# Altium PCB esp.PcbDoc
Units mm, origin at the board's own origin, x right, y up, seen from the top; angles counter-clockwise.
Board outline 25.4 x 51.8 mm, 2 copper layers (Top Layer, Bottom Layer); 34 components, 42 nets, 236 pads, 65 vias.
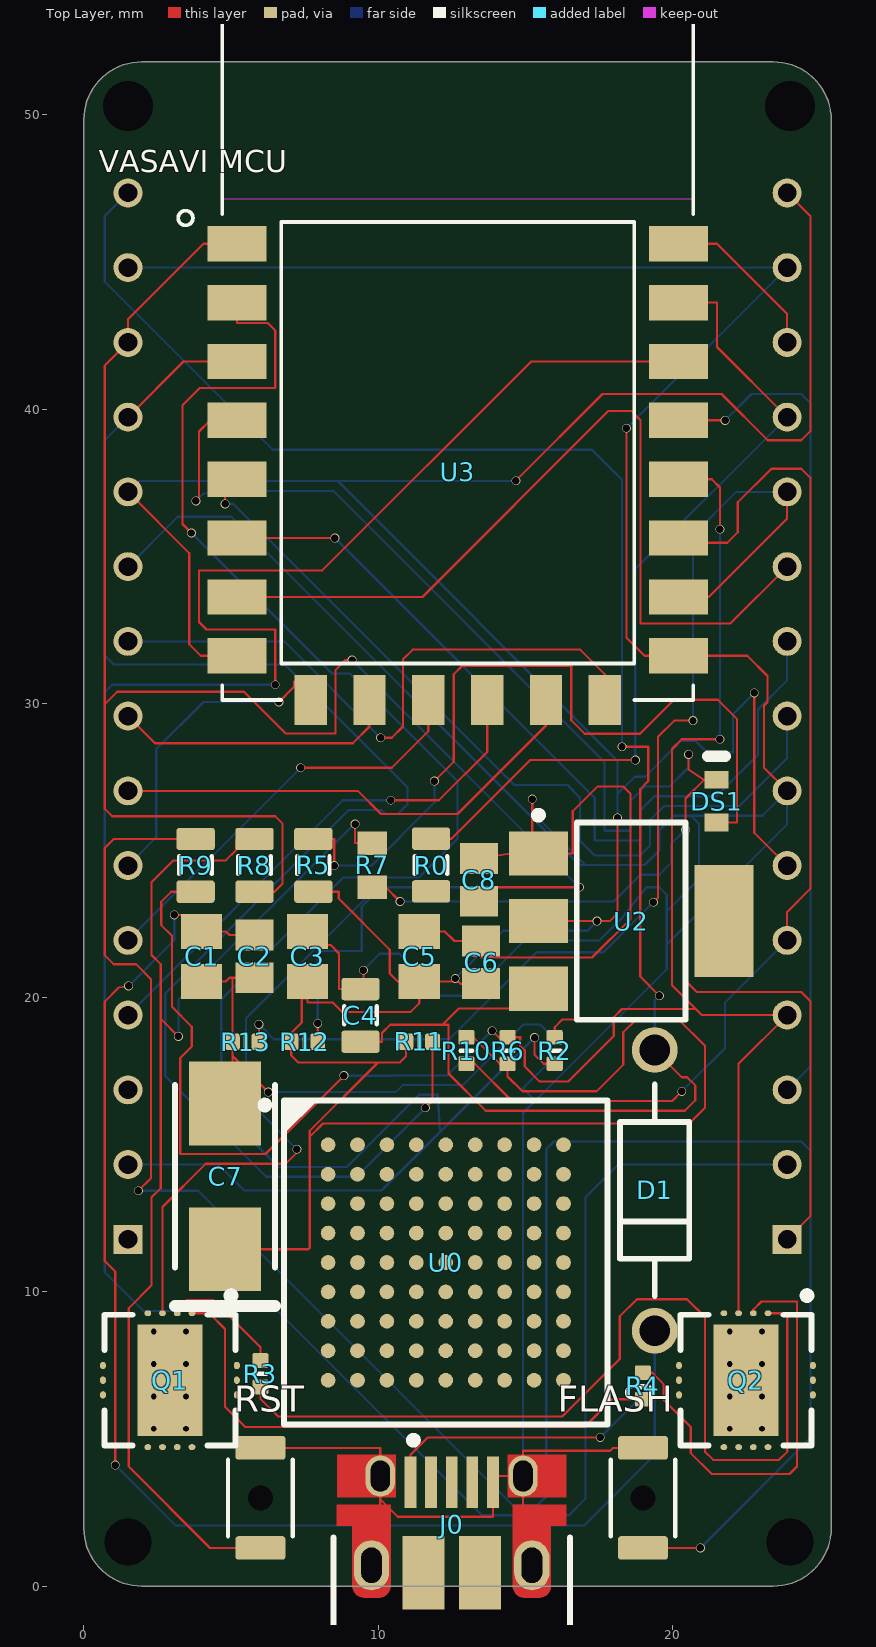
[diagram p0: Top Layer view]
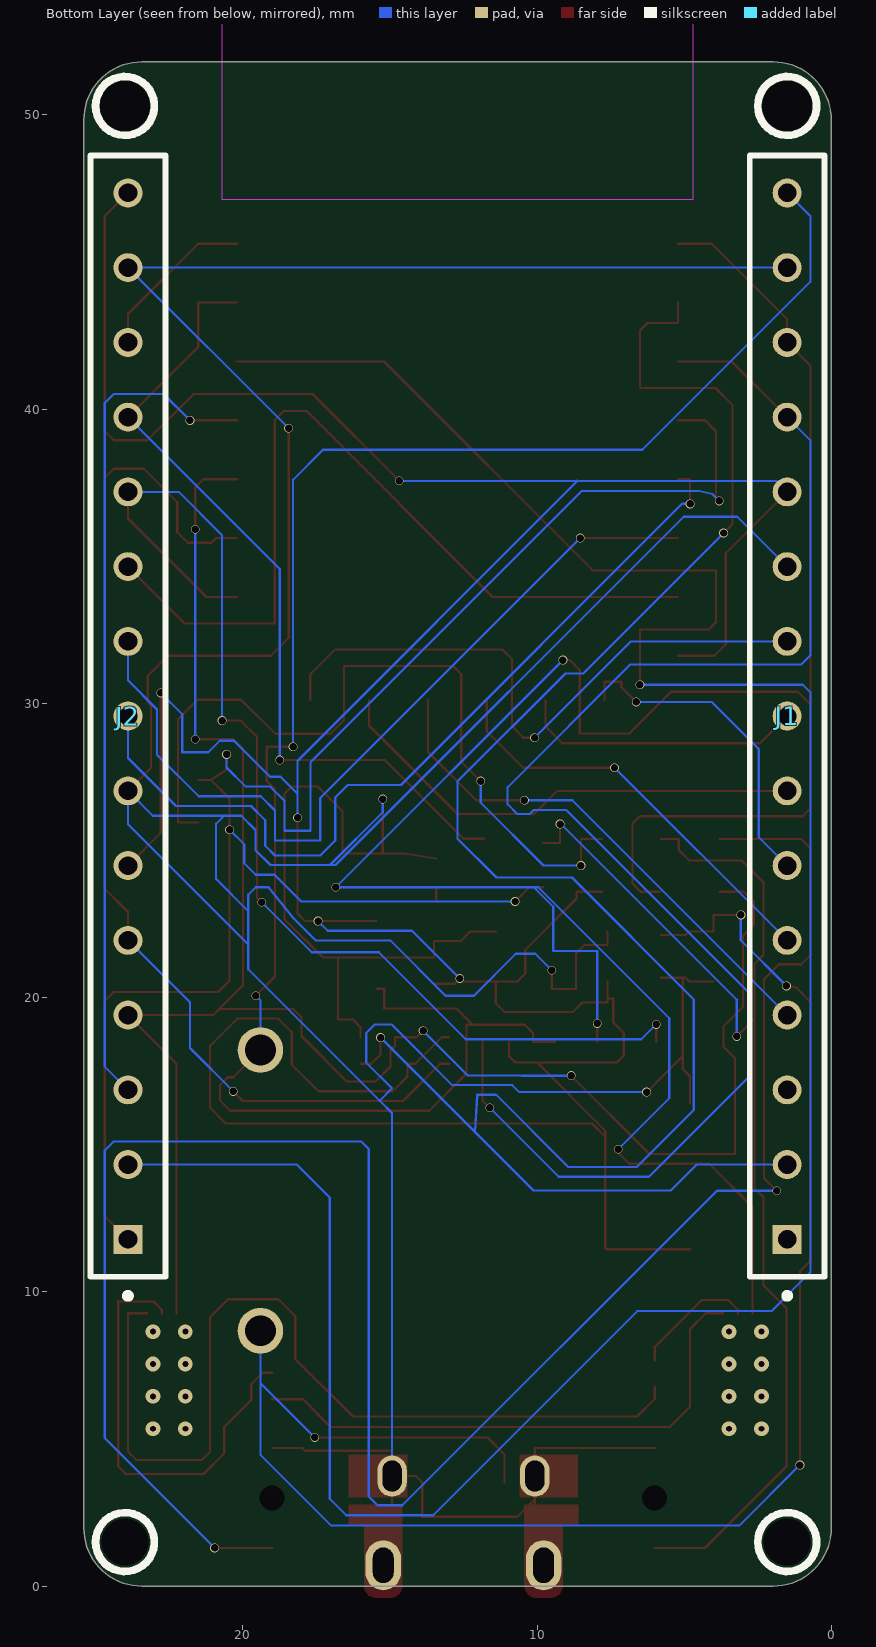
[diagram p1: Bottom Layer view, seen from below]
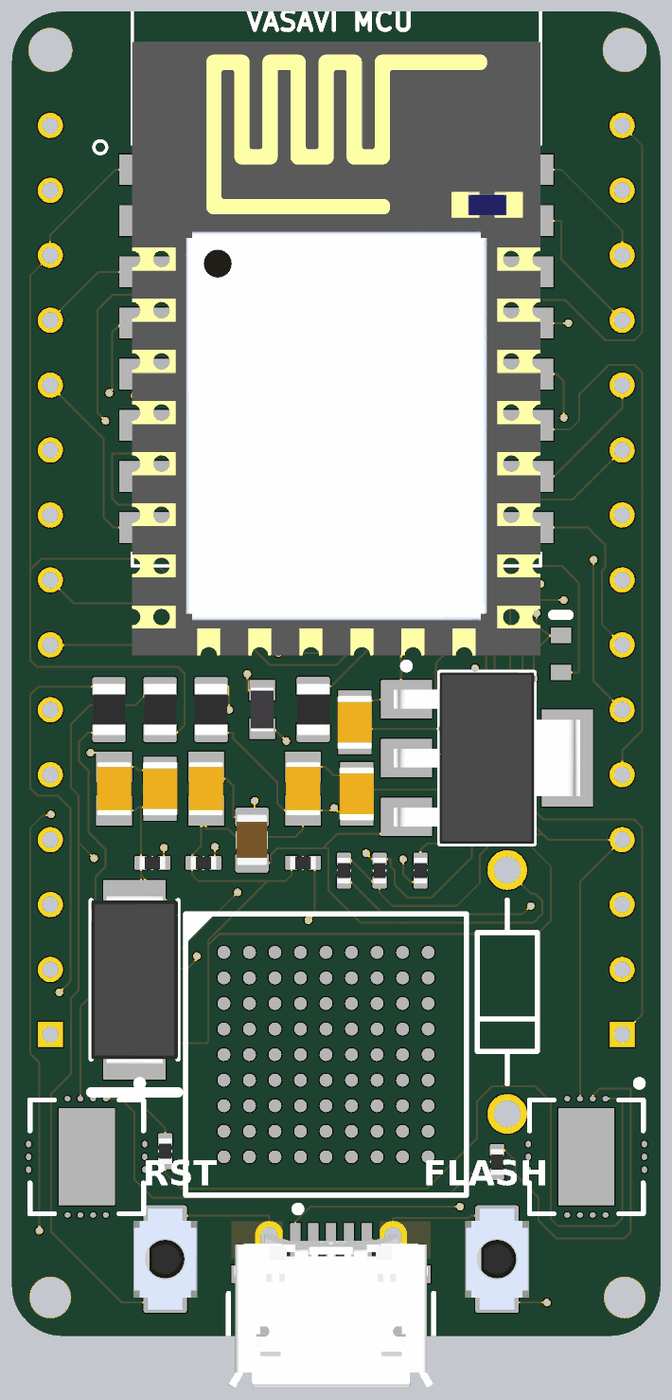
[diagram p2: 3D render of the assembled board from above, using the file's embedded part models]

## Layer stack, top to bottom
Top Solder: solder mask 0.0102, Solder Resist, Dk 3.5
Top Layer: signal copper 0.0356
Dielectric 1: dielectric 0.32, FR-4, Dk 4.8
Bottom Layer: signal copper 0.0356
Bottom Solder: solder mask 0.0102, Solder Resist, Dk 3.5

## Board outline
0,1.975 0,49.825 cw(c1.975,49.825) 1.975,51.8 23.425,51.8 cw(c23.425,49.825) 25.4,49.825 25.4,1.975 cw(c23.425,1.975) 23.425,0 1.975,0 cw(c1.975,1.975)

## Design rules (kind name [scope] priority, off if disabled: settings)
AssemblyTestPointUsage [All] p1: isadvanced=TRUE
AssemblyTestpoint [All] p1: isadvanced=TRUE testpointundercomponent=TRUE minsize=1.016 maxsize=2.54 preferedsize=1.524 minholesize=0 maxholesize=1.016 preferedholesize=0.813 testpointgrid=0.025 usegrid=TRUE gridtolerance=0 allowsidetop=TRUE allowsidebottom=TRUE
Clearance Clearance_1 [OnMid vs OnMid] p1: gap=0.254 ignorepadtopadclearanceinfootprint=FALSE sourcerule=44 cellrowname=All cellrowtype=0 cellcolname=All cellcoltype=0 innerlayers=TRUE
Clearance Clearance_2 [(ExistsOnLayer('Top Layer') Or ExistsOnLayer('Bottom Layer')) vs (ExistsOnLayer('Top Layer') Or ExistsOnLayer('Bottom Layer'))] p2: gap=0.254 ignorepadtopadclearanceinfootprint=FALSE sourcerule=44 cellrowname=All cellrowtype=0 cellcolname=All cellcoltype=0 outerlayers=TRUE
Clearance [All] p3: gap=0.254 ignorepadtopadclearanceinfootprint=FALSE ismatrix=TRUE
ComponentClearance [All] p1: isadvanced=TRUE gap=0.254 collisioncheckmode=3 verticalgap=0.254 showdistances=FALSE
DiffPairsRouting [All] p1: maxlimit=0.254 minlimit=0.254 mostfreqgap=0.254 toplayer_minwidth=0.381 toplayer_maxwidth=0.381 toplayer_prefwidth=0.381 bottomlayer_minwidth=0.381 bottomlayer_maxwidth=0.381 bottomlayer_prefwidth=0.381 maxuncoupledlength=12.7
FabricationTestPointUsage [All] p1: isadvanced=TRUE valid=0 allowmultiple=FALSE
FabricationTestpoint [All] p1: isadvanced=TRUE side=3 testpointundercomponent=TRUE minsize=1.016 maxsize=2.54 preferedsize=1.524 minholesize=0 maxholesize=1.016 preferedholesize=0.813 testpointgrid=0.025 allowsidetop=TRUE allowsidebottom=TRUE usegrid=TRUE gridtolerance=0
FanoutControl Fanout_BGA [IsBGA] p1: isadvanced=TRUE bgadir=Out bgaviamode=Centered fanoutstyle=Auto fanoutdirection=Alternating viagrid=0.025 // Fanout_BGA (Default Rule)
FanoutControl Fanout_LCC [IsLCC] p2: isadvanced=TRUE bgadir=Out bgaviamode=Centered fanoutstyle=Auto fanoutdirection=Alternating viagrid=0.025 // Fanout_LCC (Default Rule)
FanoutControl Fanout_SOIC [IsSOIC] p3: isadvanced=TRUE bgadir=Out bgaviamode=Centered fanoutstyle=Auto fanoutdirection=Alternating viagrid=0.025 // Fanout_SOIC (Default Rule)
FanoutControl Fanout_Small [(CompPinCount < 5)] p4: isadvanced=TRUE bgadir=Out bgaviamode=Centered fanoutstyle=Auto fanoutdirection=OutThenIn viagrid=0.025 // Fanout_Small (Default Rule)
FanoutControl Fanout_Default [All] p5: isadvanced=TRUE bgadir=Out bgaviamode=Centered fanoutstyle=Auto fanoutdirection=Alternating viagrid=0.025 // Fanout_Default (Default Rule)
Height [All] p1: isadvanced=TRUE minheight=0 maxheight=25.4 prefheight=12.7
HoleSize [All] p1: isadvanced=TRUE absolutevalues=TRUE maxlimit=2.54 minlimit=0.025 maxpercent=80.000 minpercent=20.000
HoleToHoleClearance [All] p1: isadvanced=TRUE gap=0.254 allowstackedmicrovias=TRUE
LayerPairs [All] p1: isadvanced=TRUE enforce=TRUE
MinimumSolderMaskSliver [All] p1: isadvanced=TRUE minsoldermaskwidth=0.1
NetAntennae [All] p1: isadvanced=TRUE netantennaetolerance=0
PasteMaskExpansion [All] p1: isadvanced=TRUE expansion=0
PlaneClearance [All] p1: isadvanced=TRUE clearance=0.508
PlaneConnect [All] p1: isadvanced=TRUE planeconnectstyle=Relief reliefexpansion=0.508 reliefentries=4 reliefconductorwidth=0.254 reliefairgap=0.254
PolygonConnect "Schematic Polygon Connect Style" [InNet('DSR')] p1: connectstyle=Relief reliefconductorwidth=0.254 reliefentries=4 polygonreliefangle="90 Angle" airgapwidth=0.254
PolygonConnect [All] p2: connectstyle=Relief reliefconductorwidth=0.254 reliefentries=4 polygonreliefangle="90 Angle" airgapwidth=0.254
RoutingCorners RoutingCornerStyle_1 [All] p1: isadvanced=TRUE cornerstyle=Round minsetback=2.54 maxsetback=2.54
RoutingCorners [All] p2: isadvanced=TRUE cornerstyle=45-Degree minsetback=2.4 maxsetback=2.44
RoutingPriority [All] p1: isadvanced=TRUE routingpriority=0
RoutingVias RoutingViaStyle_1 [All] p1: isadvanced=TRUE holewidth=0.254 width=0.3 viastyle="Through Hole" minholewidth=0.25 minwidth=0.25 maxholewidth=0.254 maxwidth=0.6
RoutingVias [All] p2: holewidth=0.711 width=1.27 viastyle="Through Hole" minholewidth=0.711 minwidth=1.27 maxholewidth=0.711 maxwidth=1.27
ShortCircuit [All] p1: isadvanced=TRUE allowed=FALSE
SilkToSilkClearance [All] p1: isadvanced=TRUE silktosilkclearance=0.254
SilkToSolderMaskClearance [IsPad] p1: isadvanced=TRUE minsilkscreentomaskgap=0.254 clearancetoexposedcopper=TRUE
SolderMaskExpansion [All] p1: isadvanced=TRUE expansion=0.052 istentingtop=FALSE
SupplyNets "Schematic Supply Nets_3" [InNet('GND')] p1: isadvanced=TRUE voltage=0.000
SupplyNets "Schematic Supply Nets_2" [InNet('VCCUSB')] p2: isadvanced=TRUE voltage=0.000
SupplyNets "Schematic Supply Nets_1" [InNet('VCC3V3')] p3: isadvanced=TRUE voltage=0.000
SupplyNets "Schematic Supply Nets" [InNet('VCC5V')] p4: isadvanced=TRUE voltage=0.000
UnRoutedNet [All] p1: isadvanced=TRUE
UnpouredPolygon [All] p1: isadvanced=TRUE
Width SMD_Neckdown [All] p1: isadvanced=TRUE maxlimit=0.254 minlimit=0.05 preferedwidth=0.075 minimp=50.000000 maximp=50.000000 favimp=50.000000
Width [All] p2: maxlimit=0.254 minlimit=0.254 preferedwidth=0.254
3 further rules are at their usual default settings.

## Classes and differential pairs
differential pair D: +D_P -D_N

## Components (designator, comment, footprint, x,y, rotation, side; value= is the part's Value field where it differs from the comment)
C1 "Capacitor 10 uF +/- 10% 16 V 0805" CAPC2013X135X45NL10T25 4,21.4 r90 top value=10µF
C2 "Capacitor 100 nF +/-10% 50 V 0805" CAPC2013X95X50LL10T25 5.8,21.4 r90 top value=100nF
C3 "Capacitor 10 uF +/- 10% 16 V 0805" CAPC2013X135X45NL10T25 7.6,21.4 r90 top value=10µF
C4 "Capacitor 10µF +/-20% 25V 0805" CAPC0805(2012)145_L 9.4,19.4 r90 top value=10µF
C5 "Capacitor 10 uF +/- 10% 16 V 0805" CAPC2013X135X45NL10T25 11.4,21.4 r90 top value=10µF
C6 "Capacitor 100 nF +/-10% 50 V 0805" CAPC2013X95X50LL10T25 13.5,21.2 r90 top value=100nF
C7 "TAJC107K016RNJ" AVX-TAJ-C-2_M 4.8,13.925 r90 top value=100µF
C8 "Capacitor 100 nF +/-10% 50 V 0805" CAPC2013X95X50LL10T25 13.425,24 r90 top value=100nF
D1 "1N5819" ONSC-AXIAL_LEAD-2-59-10_P 19.4,13.45 r90 top
DS1 "TLMB1100-GS08" VISH-TLMX1100-2_V 21.5,26.675 r90 top
FLASH "KEY_FLASH" OMRON-B3U-1000P-2-B_V 19,3 r90 top (schematic designator SW2)
J0 "10103594-0001LF" FCI-10103594-0001LF_V 12.5,2.1 r0 top
J1 "TS-115-G-AA" SAMTEC_TS-115-G-AA 1.5,29.566 r90 bottom
J2 "TS-115-G-AA" SAMTEC_TS-115-G-AA 23.9,29.566 r90 bottom
Q1 "SS8050DBU" QFN50P400X400X80_HS-15N 2.925,7 r270 top
Q2 "SS8050DBU" QFN50P400X400X80_HS-15N 22.5,7 r270 top
R0 "Resistor 470R +/-5% 0805 125 mW" RESC0805(2012)_L 11.8,24.5 r270 top value=470
R1 "MCRE000196" MCRE000196-Footprint-1 329.692,40.513 r90 top value=220k
R2 "Resistor 100K +/-1 % 0402 63 mW" RESC0402(1005)_L 16,18.2 r90 top value=100k
R3 "Resistor 12K  +/-1 % 0402 63 mW" RESC0402(1005)_L 6,7.22 r90 top value=12k
R4 "Resistor 12K  +/-1 % 0402 63 mW" RESC0402(1005)_L 19,6.8 r90 top value=12k
R5 "Resistor 470R +/-5% 0805 125 mW" RESC0805(2012)_L 7.8,24.5 r90 top value=470
R6 "Resistor 12K  +/-1 % 0402 63 mW" RESC0402(1005)_L 14.4,18.2 r90 top value=12k
R7 "Resistor 0R +/- 5% 0603 100 mW" RESC1608X55X25ML10T15 9.8,24.5 r90 top value=0
R8 "Resistor 470R +/-5% 0805 125 mW" RESC0805(2012)_L 5.8,24.5 r90 top value=470
R9 "Resistor 470R +/-5% 0805 125 mW" RESC0805(2012)_L 3.8,24.5 r90 top value=470
R10 "Resistor 12K  +/-1 % 0402 63 mW" RESC0402(1005)_L 13,18.2 r270 top value=12k
R11 "Resistor 12K  +/-1 % 0402 63 mW" RESC0402(1005)_L 11.4,18.5 r0 top value=12k
R12 "Resistor 12K  +/-1 % 0402 63 mW" RESC0402(1005)_L 7.5,18.5 r0 top value=12k
R13 "Resistor 12K  +/-1 % 0402 63 mW" RESC0402(1005)_L 5.5,18.5 r0 top value=12k
RST "KEY_RST/USER" OMRON-B3U-1000P-2-B_V 6,3 r90 top (schematic designator SW1)
U0 "CP2102-GM" BGA81C100P9X9_1100X1100X350 12.3,11 r0 top
U2 "NCP1117ST33T3G" ONSC-SOT-223-4-318H-01_A_V 18.6,22.6 r0 top
U3 "ESP8266-12E/ESP-12E" XCVR_ESP8266-12E/ESP-12E 12.706,38.617 r0 top

## Footprints (in the part's own frame and the unit in brackets; to place one, negate y for a bottom-side part, rotate by r counter-clockwise, add the part's x,y. Pads: shape width x height; smd on the part's side, far side on the other; paste and mask are expansions set on the pad)
AVX-TAJ-C-2_M [mm] "Molded Capacitor, 2-Leads, Body 6.2x3.4mm, IPC Low Density"
  rect 2.85x2.45 smd: 1(-2.475,0) 2(2.475,0)
  silkscreen extent -4.4,-1.7 3.1,1.7, body extent -3.32,-1.7 3.32,1.7, height 2.8
BGA81C100P9X9_1100X1100X350 [mm] "BGA, 81-Leads, Body 11.00x11.00mmx3.50mm, Pitch 1.00mm"
  round 0.5 smd: A1(-4,4) A2(-3,4) A3(-2,4) A4(-1,4) A5(0,4) A6(1,4) A7(2,4) A8(3,4) A9(4,4) B1(-4,3) B2(-3,3) B3(-2,3) B4(-1,3) B5(0,3) B6(1,3) B7(2,3) B8(3,3) B9(4,3) C1(-4,2) C2(-3,2) C3(-2,2) C4(-1,2) C5(0,2) C6(1,2) C7(2,2) C8(3,2) C9(4,2) D1(-4,1) D2(-3,1) D3(-2,1) D4(-1,1) D5(0,1) D6(1,1) D7(2,1) D8(3,1) D9(4,1) E1(-4,0) E2(-3,0) E3(-2,0) E4(-1,0) E5(0,0) E6(1,0) E7(2,0) E8(3,0) E9(4,0) F1(-4,-1) F2(-3,-1) F3(-2,-1) F4(-1,-1) F5(0,-1) F6(1,-1) F7(2,-1) F8(3,-1) F9(4,-1) G1(-4,-2) G2(-3,-2) G3(-2,-2) G4(-1,-2) G5(0,-2) G6(1,-2) G7(2,-2) G8(3,-2) G9(4,-2) H1(-4,-3) H2(-3,-3) H3(-2,-3) H4(-1,-3) H5(0,-3) H6(1,-3) H7(2,-3) H8(3,-3) H9(4,-3) J1(-4,-4) J2(-3,-4) J3(-2,-4) J4(-1,-4) J5(0,-4) J6(1,-4) J7(2,-4) J8(3,-4) J9(4,-4)
  silkscreen extent -6.27,-5.5 5.5,5.5, body extent -5.5,-5.5 5.5,5.5, height 3.5
CAPC0805(2012)145_L [mm] "Chip Capacitor, Body 2.0x1.2mm, Height 1.45mm, IPC High Density"
  rrect25% 0.76x1.3 smd: 1(-0.9,0) 2(0.89,0)
  silkscreen extent -0.3,-0.55 0.3,0.55, body extent -1,-0.6 1,0.6, height 1.45
CAPC2013X95X50LL10T25 [mm] "Chip Capacitor, 2-Leads, Body 2.10x1.35mm, IPC High Density"
  rect 1.05x1.3 smd: 1(-0.725,0) 2(0.725,0)
  body extent -1.05,-0.67 1.05,0.67, height 0.95
CAPC2013X135X45NL10T25 [mm] "Chip Capacitor, 2-Leads, Body 2.10x1.35mm, IPC Medium Density"
  rect 1.2x1.4 smd: 1(-0.85,0) 2(0.85,0)
  body extent -1.05,-0.67 1.05,0.67, height 1.35
FCI-10103594-0001LF_V [mm] "SMD, 5-Leads, Body 8.04x5.62mm, Pitch 0.65 mm"
  rect 0.4x1.75 smd: 1(-1.4,1.435) 2(-0.7,1.435) 3(0,1.435) 4(0.7,1.435) 5(1.4,1.435)
  oval 1x1.4 hole 0.65 slot 1.05 at 90 deg: 6(-2.425,1.64) 7(2.425,1.64)
  oval 1.2x1.7 hole 0.7 slot 1.2 at 90 deg: 8(2.725,-1.39) 9(-2.725,-1.39)
  rect 1.425x2.5 smd: 10(-0.962,-1.64) 11(0.963,-1.64)
  Top Layer region: -3.9,0.91 -1.9,0.91 -1.9,2.37 -3.9,2.37
  Top Layer region: 3.9,2.37 1.9,2.37 1.9,0.91 3.9,0.91
  Top Layer region: -3.375,-0.04 -3.375,-2.09 -3.373,-2.129 -3.369,-2.167 -3.365,-2.185 -3.359,-2.203 -3.348,-2.239 -3.329,-2.277 -3.308,-2.312 -3.284,-2.344 -3.258,-2.374 -3.227,-2.401 -3.194,-2.426 -3.158,-2.446 -3.121,-2.464 -3.08,-2.477 -3.049,-2.483 -3.012,-2.488 -2.975,-2.49 -2.475,-2.49 -2.432,-2.488 -2.391,-2.482 -2.351,-2.471 -2.312,-2.456 -2.28,-2.439 -2.249,-2.421 -2.217,-2.397 -2.19,-2.37 -2.164,-2.342 -2.143,-2.312 -2.121,-2.277 -2.105,-2.241 -2.093,-2.209 -2.088,-2.192 -2.084,-2.175 -2.08,-2.155 -2.076,-2.134 -2.075,-2.112 -2.075,-2.09 -2.075,-0.04 -2.075,0.66 -3.9,0.66 -3.9,-0.04
  Top Layer region: 3.375,-0.04 3.375,-2.09 3.373,-2.129 3.369,-2.167 3.365,-2.185 3.359,-2.203 3.348,-2.239 3.329,-2.277 3.308,-2.312 3.284,-2.344 3.258,-2.374 3.227,-2.401 3.194,-2.426 3.158,-2.446 3.121,-2.464 3.08,-2.477 3.049,-2.483 3.012,-2.488 2.975,-2.49 2.475,-2.49 2.432,-2.488 2.391,-2.481 2.351,-2.471 2.312,-2.456 2.28,-2.439 2.249,-2.421 2.217,-2.396 2.19,-2.37 2.164,-2.342 2.143,-2.312 2.121,-2.277 2.105,-2.241 2.093,-2.209 2.088,-2.192 2.084,-2.175 2.08,-2.155 2.076,-2.134 2.075,-2.112 2.075,-2.09 2.075,-0.04 2.075,0.66 3.9,0.66 3.9,-0.04
  silkscreen extent -4.02,-4.21 4.02,2.98, body extent -4.02,-4.15 4.02,1.88, height 2.9
MCRE000196-Footprint-1 [mm]
OMRON-B3U-1000P-2-B_V [mm] "SMT, 2-Leads, Body 3x2.5mm"
  rrect25% 0.8x1.7 smd: 1(-1.7,0) 2(1.7,0)
  round 0 hole 0.85 unplated: H1(0,0)
  silkscreen extent -1.3,-1.1 1.3,1.1, body extent -2,-1.25 2,1.25, height 1.6
ONSC-AXIAL_LEAD-2-59-10_P [mm] "AXIAL, 2-Leads, Diameter 2.35mm"
  round 1.55 hole 1.05: 1(-4.77,0) 2(4.77,0)
  silkscreen extent -3.6,-1.18 3.6,1.17, body extent -5.16,-1.17 5.16,1.17, height 2.34
ONSC-SOT-223-4-318H-01_A_V [mm] "SOT223, 4-Leads, Body 6.7x3.7mm, Pitch 2.3mm"
  rect 2x1.5 smd: 1(-3.15,2.3) 2(-3.15,0) 3(-3.15,-2.3)
  rect 2x3.8 smd: 4(3.15,0)
  silkscreen extent -3.27,-3.35 1.85,3.72, body extent -3.65,-3.35 3.65,3.35, height 1.8
QFN50P400X400X80_HS-15N [mm] "QFN, 14-Leads, Body 4.00x4.00mm, Pitch 0.50mm, Thermal Pad 4.00x2.20mm, IPC Medium Density"
  oval 0.2x0.23 smd: 1(-2.275,0.75) 2(-2.275,0.25) 3(-2.275,-0.25) 4(-2.275,-0.75) 8(2.275,-0.75) 9(2.275,-0.25) 10(2.275,0.25) 11(2.275,0.75)
  oval 0.25x0.2 smd: 5(-0.5,-2.275) 6(0,-2.275) 7(0.5,-2.275) 12(0.5,2.275) 13(0,2.275) 14(-0.5,2.275)
  rect 3.8x2.2 smd: 15(0,0)
  silkscreen extent -3,-2.22 2.23,2.23, body extent -2.07,-2.07 2.07,2.07, height 0.8
RESC0402(1005)_L [mm] "Chip Resistor, Body 1.0x0.5mm, IPC High Density"
  rrect25% 0.5x0.55 smd: 1(-0.45,0) 2(0.45,0)
  silkscreen extent 0,-0.2 0,0.2, body extent -0.5,-0.25 0.5,0.25, height 0.3
RESC0805(2012)_L [mm] "Chip Resistor, Body 2.0x1.3mm, IPC High Density"
  rrect25% 0.76x1.3 smd: 1(-0.9,0) 2(0.89,0)
  silkscreen extent -0.3,-0.55 0.3,0.55, body extent -1,-0.62 1,0.63, height 0.6
RESC1608X55X25ML10T15 [mm] "Chip Resistor, 2-Leads, Body 1.70x0.90mm, IPC Low Density"
  rect 0.8x1 smd: 1(-0.75,0) 2(0.75,0)
  body extent -0.85,-0.45 0.85,0.45, height 0.55
SAMTEC_TS-115-G-AA [mm]
  rect 0.985x0.985 hole 0.635: 01(-17.78,0)
  round 0.985 hole 0.635: 02(-15.24,0) 03(-12.7,0) 04(-10.16,0) 05(-7.62,0) 06(-5.08,0) 07(-2.54,0) 08(0,0) 09(2.54,0) 10(5.08,0) 11(7.62,0) 12(10.16,0) 13(12.7,0) 14(15.24,0) 15(17.78,0)
  silkscreen extent -19.8,-1.27 19.05,1.27
VISH-TLMX1100-2_V [mm] "SMD, 2-Leads, Body 1.6x0.8mm"
  rect 0.6x0.8 smd: 1(-0.725,0) 2(0.725,0)
  silkscreen extent 1.52,-0.3 1.52,0.3, body extent -0.8,-0.4 0.8,0.4, height 0.65
XCVR_ESP8266-12E/ESP-12E [mm]
  rect 2x1.2 smd: 1(-7.5,7) 2(-7.5,5) 3(-7.5,3) 4(-7.5,1) 5(-7.5,-1) 6(-7.5,-3) 7(-7.5,-5) 8(-7.5,-7) 15(7.5,-7) 16(7.5,-5) 17(7.5,-3) 18(7.5,-1) 19(7.5,1) 20(7.5,3) 21(7.5,5) 22(7.5,7)
  rect 1.1x1.7 smd: 9(-5,-8.5) 10(-3,-8.5) 11(-1,-8.5) 12(1,-8.5) 13(3,-8.5) 14(5,-8.5)
  Keep-Out Layer region: 8,8.51 -8.009,8.51 -8.009,15.5 8,15.5
  Keep-Out Layer region: 8,8.51 -8.009,8.51 -8.009,15.5 8,15.5
  silkscreen extent -9.5,-8.5 8,15.5, body extent -8,-12 8,12, height 3

## Part data
C1 C3 C5: library part CMP-001-00015-6, "Chip Capacitor, 10 uF, +/- 10%, 16 V, 0805 (2012 Metric)", Capacitor Type=Ceramic, Case/Package=0805, Max Operating Temperature=85°C, Min Operating Temperature=-55°C, Tolerance=10%, Voltage Rating=16V, Mounting Technology=SM, Pins=2, RoHS Compliant=True
C2 C6 C8: library part CMP-001-00018-6, "Chip Capacitor, 100 nF, +/- 10%, 50 V, 0805 (2012 Metric)", Capacitor Type=Ceramic, Case/Package=0805, Max Operating Temperature=125°C, Min Operating Temperature=-55°C, Tolerance=10%, Voltage Rating=50V, Mounting Technology=SM, Pins=2, RoHS Compliant=True
C4: library part CMP-001-00079-4, "Chip Capacitor, 10µF +/-20%, 25V, 0805, Thickness 1.45 mm", Case/Package=0805, Max Operating Temperature=85°C, Min Operating Temperature=-55°C, Tolerance=10%, Voltage Rating=25V, Mounting Technology=SMT, Pins=2
C7: library part CMP-001-00046-7, "Standard Tantalum, 100 uF, +/- 10%, 16 V, -55 to 125 degC, 2312 (6032 Metric), RoHS, Tape and Reel", Capacitor Type=Tantalum, Case/Package=2412, Manufacturer=AVX, Max Operating Temperature=125°C, Min Operating Temperature=-55°C, Package Description="2-Pin Surface Mount Device, Body 6 x 3.25 mm", Package Quantity=500, Package Reference=TAJ-C-2, Resistance=1Ohm, Tolerance=10%, Voltage Rating=16V, Datasheet URL=http://datasheets.avx.com/TAJ.pdf, Datasheet Version=Feb-16, ESR=1Ohm, Manufacturer URL=http://www.avx.com/, Mounting Technology=SM, Packaging=TapeandReel, RoHS Compliant=True
D1: library part CMP-004-00009-2, "Low Drop Power Schottky Rectifier, 40 V, 1 A, 2-Pin DO-41, RoHS", Case/Package=DO, Forward Current=1A, Manufacturer="ON Semiconductor", Max Operating Temperature=125°C, Max Surge Current=25A, Min Operating Temperature=-65°C, Package Description="2-Pin, Axial Lead, Diameter 2.35 mm", Package Reference=AXIAL_LEAD-2-59-10, Package Version="Rev. U, 02/2005", Peak Reverse Current=1mA, Datasheet URL=http://www.onsemi.cn/pub_link/Collateral/1N5817-D.PDF, Datasheet Version="Rev. 10, 07/2006", Manufacturer URL=http://www.onsemi.com/, Mounting Technology=TH, Package URL=http://www.onsemi.cn/pub_link/Collateral/59-10.PDF, Packaging=Bulk, Pins=2, RoHS Compliant=True
DS1: library part CMP-007-00028-2, "Blue LED, 10 mA, 3.9 V, -40 to 100 degC, 2-Pin SMD (0603), RoHS, Tape and Reel", Case/Package=0603, Colour=Blue, Forward Current=10mA, Forward Voltage=3.9V, Manufacturer="Vishay Semiconductor", Max Operating Temperature=100°C, Min Operating Temperature=-40°C, Package Description="2-Pin Surface Mount Device, Body 1.6 x 0.8 mm", Package Quantity=3000, Power=68mW, Datasheet URL=http://download.siliconexpert.com/pdfs/2016/8/7/12/43/26/667/vsh_/manual/379263299541529tlmb1100.pdf, Datasheet Version="Rev. 2.7, 03/2016", Illumination Colour=Blue, Lens Style=Diffused, Luminous Intensity=5mcd, Manufacturer URL=http://www.vishay.com/, Mounting Technology=SM, Nominal Vf=3.9V, Package Reference=0603, Packaging=TapeandReel, Pins=2, RoHS Compliant=True, Viewing Angle=160degrees
FLASH RST: library part CMP-011-00011-3, "Ultra-small Surface-mounting Tactile Switches with High Contact Reliability, SPST-NO, -25 to 70 degC, 2-Pin SMD, RoHS, Tape and Reel", Current Rating=50mA, Voltage Rating=12V, Pins=2, RoHS Compliant=Details
J0: library part CMP-002-00038-3, "Micro USB 2.0 B Receptacle, 5 Position, Height 3.24 mm, -55 to 85 degC, RoHS, Tape and Reel", Case/Package=FCI-10103594-0001LF, Current Rating=1.8A, Manufacturer="FCI Electronics", Max Operating Temperature=85°C, Min Operating Temperature=-55°C, Package Description="5-Pin Surface Mount Device, Body 8.04 x 5.62 mm", Package Quantity=1500, Voltage Rating=100V, Connector Type=USB, Contact Material=Copper, Contact Plating=Gold, Datasheet URL=http://portal.fciconnect.com/Comergent//fci/drawing/10103594.pdf, Datasheet Version="Rev. A, 06/2010", Gender=Female, Lead Pitch=0.65mm, Manufacturer URL=http://portal.fciconnect.com/, Mounting Technology=SM, Package Reference=FCI-10103594-0001LF, Packaging=TapeandReel, Pins=5, RoHS Compliant=True
J1 J2: library part CMP-007-000000-1, Package=None, Availability=Unavailable, Component Type=Standard, Design Item ID=TS-115-G-AA, MF=Samtec, MP=TS-115-G-AA, Pin Count=15, Price=None, Source=TS-115-G-AA.SchLib
Q1 Q2: library part CMP-013-00034-1, "Small Signal Bipolar Transistor, 1.5A I(C), 25V V(BR)CEO, 1-Element, NPN, Silicon, TO-92", Frequency=190MHz, Max Operating Temperature=150°C, Pins=3, RoHS Compliant=Yes
R0 R5 R8 R9: library part CMP-009-00122-3, "Chip Resistor, 470 Ohms, +/-5%, 125 mW, -55 to 155 degC, 0805", Case/Package=0805, Max Operating Temperature=155°C, Min Operating Temperature=-55°C, Power=125mW, Tolerance=5%, Pins=2
R1: library part CMP-009-00177-1, "Fixed Resistor, Metal Glaze/thick Film, 0.05W, 220000ohm, 25V, 1% +/-Tol, -200,200ppm/Cel, 0201", Case/Package=0201, Max Operating Temperature=125°C, Min Operating Temperature=-55°C, Power=50mW, Tolerance=1%, Pins=2, RoHS Compliant=Yes
R2: library part CMP-009-00168-3, "Chip Resistor, 100 kOhms, +/-1 %, 63 mW, -55 to 155 degC, 0402", Case/Package=0402, Max Operating Temperature=155°C, Min Operating Temperature=-55°C, Power=63mW, Tolerance=1%, Pins=2
R3 R4 R6 R10 R11 R12 R13: library part CMP-009-00173-3, "Chip Resistor, 12 kOhms, +/-1 %, 63 mW, -55 to 155 degC, 0402", Case/Package=0402, Max Operating Temperature=155°C, Min Operating Temperature=-55°C, Power=63mW, Tolerance=1%, Pins=2
R7: library part CMP-009-00006-5, "Chip Resistor, 0 Ohm, 0.1 W, -55 to 155 degC, 0603 (1608 Metric)", Case/Package=0603, Max Operating Temperature=155°C, Min Operating Temperature=-55°C, Power=100mW, Tolerance=5%, Voltage Rating=50V, Mounting Technology=SM, Pins=2, RoHS Compliant=True
U0: library part CMP-005-00013-1, "USB Bus Controller, CMOS", Case/Package=HVQCCN, Max Operating Temperature=85°C, Min Operating Temperature=-40°C, Pins=28, RoHS Compliant=Yes
U2: library part CMP-019-00030-3, "Low-Dropout Positive Fixed Voltage Regulator, 1 A, 3.3 V Output Voltage, 0 to 125 degC, 4-Pin SOT-223 (318H-01), Pb-Free, Tape and Reel", Case/Package=SOT-223-4, Dropout Voltage=1.1V, Manufacturer="ON Semiconductor", Max Input Voltage=20V, Max Operating Temperature=125°C, Max Ouput Current=1A, Max Supply Voltage=15V, Min Input Voltage=3.5V, Min Operating Temperature=0°C, Min Supply Voltage=4.75V, Nominal Output Voltage=3.3V, Package Description="4-Pin Small Outline Transistor, Body 6.5 x 3.5 mm, Pitch 2.3 mm", Package Quantity=4000, Package Reference=SOT-223-4-318H-01_A, Datasheet URL=http://www.onsemi.com/pub_link/Collateral/NCP1117-D.PDF, Datasheet Version="Rev. 27, 09/2014", Manufacturer URL=http://www.onsemi.com/, Mounting Technology=SM, Output Current=1A, Output Voltage=3.3V, Outputs=1, Packaging=TapeandReel, Pins=3, RoHS Compliant=True
U3: library part CMP-009-000000-1, "This WiFi module has a 32-bit MCU micro and clock speeds supporting 80 MHz or 160 MHz. Supports the RTOS and integrated Wi-Fi MAC/BB/RF/PA/LNA, and has an on-board antenna.", Package=None, Availability="Not in stock", Check_prices=https://www.snapeda.com/parts/ESP8266-12E/ESP-12E/AI-Thinker/view-part/?ref=eda, Component Type=Standard, Design Item ID=ESP8266-12E/ESP-12E, MF=AI-Thinker, MP=ESP8266-12E/ESP-12E, Pin Count=22, Price=None, SnapEDA_Link=https://www.snapeda.com/parts/ESP8266-12E/ESP-12E/AI-Thinker/view-part/?ref=snap, Source=ESP8266-12E_ESP-12E.SchLib

## Free pads (board coordinates)
  round 2.54 hole 2.032: 3(510.54,501.142) 5(452.247,441.452)
  round 1.524 hole 1.6: 6(24,1.5) 21(1.5,1.5)
  round 1.524 hole 1.7: 22(24,50.3) 23(1.5,50.3)

## Via types
v1: diameter 0.3, hole 0.254, Top Layer to Bottom Layer, 49 vias
v2: diameter 0.5, hole 0.2, Top Layer to Bottom Layer, 16 vias

## Nets (pads, with @x,y where several pads share a name; then routed paths per layer and width w, separated by ;. In a path a pad name is that pad's centre, name@x,y a point inside that pad or via, vN(x,y) a via of type N, cw(c..) or ccw(c..) an arc to the next point about the centre after c; other vN are vias at no path point)
ACTIVE: 
ADC: J1.02 R2.1 U3.2 | length 68.6
  Top Layer w0.075: v1(3.658,35.789) 3.353,36.093 3.353,40.132 3.937,40.716 6.502,40.716 6.502,42.672 6.248,42.926 5.206,42.926 U3.2 ; v1(15.316,18.644) 15.316,18.062 15.628,17.75 R2.1
  Bottom Layer w0.075: J1.02 4.573,14.326 5.453,13.446 10.119,13.446 12.105,15.433 ; v1(3.658,35.789) 8.433,31.013 9.034,31.013 12.7,27.348 12.7,25.4 11.379,24.079 8.814,24.079 4.674,19.939 4.674,16.181 6.613,14.242 8.933,14.242 11.389,16.698 12.03,16.698 12.105,15.433 ; v1(15.316,18.644) 12.105,15.433
"ADC EX": J1.01
CTS: 
D_N: J0.2
D_P: J0.3
DCD: 
DSR: 
DTR: Q2.1 R3.1 | length 31.5
  Top Layer w0.075: R3.1 6,6.37 6.604,5.766 16.256,5.766 18.212,7.722 18.212,9.169 18.796,9.754 20.498,9.754 21.107,9.144 21.107,4.572 21.387,4.293 23.622,4.293 23.901,4.572 23.901,9.275 Q2.1
EN: J1.12 R11.2 U3.3 | length 53
  Top Layer w0.075: J1.12 3.391,41.617 U3.3 ; v1(11.608,16.256) 11.85,16.498 R11.2
  Bottom Layer w0.075: J1.12 0.711,38.937 0.711,31.623 1.016,31.318 6.833,31.318 10.998,27.153 10.998,26.568 10.668,26.238 10.246,26.238 10.109,26.375 9.002,26.375 2.769,20.142 2.769,17.339 6.195,13.913 9.265,13.913 v1(11.608,16.256)
GND: C1.1 C2.1 C3.2 C4.2 C5.2 C6.2 C7.2 C8.2 FLASH.2 J0.5 J0.6 J0.7 J0.8 J0.9 J1.10 J1.14 J2.07 J2.14 R2.2 R13.1 RST.2 U2.1 U3.15 | length 197.9
  Top Layer w0.075: C1.1 4.826,20.55 4.951,20.675 5.05,20.675 ; C7.2 4.8,17.323 5.05,17.573 5.05,18.013 ; C2.1 5.05,20.675 ; RST.2 10.075,4.7 J0.6 10.075,2.955 ; v1(6.274,16.789) 5.632,17.432 5.05,18.013 ; C3.2 7.6,21.793 8.382,21.793 8.672,21.503 8.672,20.29 C4.2 9.5,20.29 v1(9.5,20.93) ; J0.9 9.775,2.057 10.075,2.357 10.075,2.955 ; C5.2 12.268,22.25 12.593,21.925 C6.2 13.5,21.361 16.764,21.361 ; C8.2 14.501,24.9 U2.1@15.24,24.9 ; J0.8 15.225,2.057 14.925,2.357 J0.7 ; v1(15.24,26.745) U2.1@15.24,24.9 ; R2.2 16,18.997 16.256,19.253 16.764,19.253 16.764,21.361 ; v1(18.439,39.346) 18.439,32.227 19.05,31.617 U3.15 22.544,31.617 23.231,30.93 23.231,30.047 23.114,29.93 23.114,27.812 J2.07 ; FLASH.2 17.984,4.7 17.885,4.601 14.925,4.601 J0.7 ; 5.05,18.013 R13.1 5.05,20.675 ; 10.075,2.955 10.668,2.362 13.9,2.362 J0.5 14.105,3.74 J0.7 ; U2.1@15.24,24.9 U2.1 16.612,24.9 16.612,26.33 17.46,27.178 18.323,27.178 18.577,26.924 18.577,22.667 17.272,21.361 16.764,21.361
  Bottom Layer w0.075: J1.10 3.192,36.338 5.011,36.338 16.846,24.504 17.036,24.504 ; J1.14 J2.14 v1(18.439,39.346) ; v1(6.274,16.789) 10.6,16.789 10.837,17.027 12.877,17.027 14.935,19.085 15.51,19.085 15.799,18.796 15.799,17.791 14.925,16.916 15.344,16.497 ; v1(9.5,20.93) 10.058,21.488 10.719,21.488 12.141,20.066 13.106,20.066 14.986,21.946 17.526,21.946 18.288,22.708 19.126,23.749 19.558,23.749 19.812,23.495 19.812,22.938 ; J0.7 14.925,16.078 15.344,16.497 ; v1(15.24,26.745) 15.24,26.3 17.036,24.504 ; 15.344,16.497 19.812,20.965 19.812,21.803 ; 17.036,24.504 19.056,24.504 19.564,25.012 19.564,25.699 20.048,26.182 20.63,26.182 ; 19.812,21.803 23.9,25.891 J2.07 23.056,26.182 20.63,26.182 ; 19.812,21.803 19.812,22.938 ; 19.812,22.938 20.904,24.03 20.904,25.908 20.63,26.182
GPIO0: J2.04 Q2.3 R6.2 R9.1 U3.18 | length 67.4
  Top Layer w0.075: R9.1 2.974,23.6 2.632,23.258 2.632,22.463 2.997,22.098 2.997,19.685 3.667,19.015 3.667,18.339 3.277,17.948 3.277,14.683 6.174,14.683 v1(8.839,17.348) ; v1(13.872,18.875) 14.097,18.65 R6.2 14.827,18.65 14.827,18.363 14.981,18.208 14.981,17.658 15.494,17.145 16.455,17.145 18.004,18.694 18.004,19.332 18.288,19.616 20.796,19.616 ; U3.18 21.337,37.617 21.615,37.338 v1(21.615,35.916) ; v1(21.615,28.778) 20.321,28.778 19.99,28.448 19.99,20.421 20.796,19.616 ; Q2.3 22.25,17.756 J2.04 21.005,19.406 20.796,19.616
  Bottom Layer w0.075: v1(8.839,17.348) 10.501,17.348 10.508,17.356 12.352,17.356 v1(13.872,18.875) ; v1(21.615,28.778) v1(21.615,35.916)
GPIO2: J2.05 R10.2 U3.17 | length 37
  Top Layer w0.075: R10.2 13.289,17.75 14.552,16.487 19.992,16.487 v1(20.32,16.815) ; U3.17 20.904,35.617 21.063,35.458 21.869,35.458 22.225,35.814 22.225,36.83 23.368,37.973 24.384,37.973 24.689,37.668 24.689,23.698 23.9,22.909 J2.05
  Bottom Layer w0.075: v1(20.32,16.815) 21.793,18.288 21.793,19.839 J2.05
GPIO4: J2.03 U3.19 | length 28.6
  Top Layer w0.075: U3.19 v1(21.793,39.617)
  Bottom Layer w0.075: v1(21.793,39.617) 22.689,40.513 24.384,40.513 24.689,40.208 24.689,17.655 J2.03
GPIO5: J2.02 U3.20 | length 88.7
  Top Layer w0.075: v1(6.502,30.632) 6.502,32.512 4.169,32.512 3.915,32.766 3.915,34.519 8.103,34.519 15.201,41.617 U3.20
  Bottom Layer w0.075: v1(6.502,30.632) 0.965,30.632 0.711,30.378 0.711,10.668 2.032,9.347 6.594,9.347 13.528,2.413 16.485,2.413 17.043,2.972 17.043,13.208 18.161,14.326 J2.02
GPIO9: J1.05 U3.11 | length 14.2
  Top Layer w0.075: v1(7.367,27.813) 10.465,27.813 11.706,29.055 U3.11
  Bottom Layer w0.075: J1.05 v1(7.367,27.813)
GPIO10: J1.04 U3.12 | length 17.7
  Top Layer w0.075: v1(10.428,26.704) 12.064,26.704 13.706,28.346 U3.12
  Bottom Layer w0.075: J1.04 8.798,26.704 v1(10.428,26.704)
GPIO12: J2.09 U3.6 | length 28.9
  Top Layer w0.075: U3.6 v1(8.533,35.617)
  Bottom Layer w0.075: v1(8.533,35.617) 17.365,26.785 17.365,25.341 18.906,25.341 18.906,26.357 19.39,26.84 21.498,26.84 22.91,28.252 22.91,29.793 23.9,30.783 J2.09
GPIO13: J2.10 U3.7 | length 29.2
  Top Layer w0.075: U3.7 11.509,33.617 17.831,39.939 18.6,39.939 18.915,39.624 18.915,32.715 21.969,32.715 J2.10
GPIO14: J2.08 U3.5 | length 29.5
  Top Layer w0.075: v1(4.801,36.779) 4.801,37.617 U3.5
  Bottom Layer w0.075: v1(4.801,36.779) 5.07,36.779 14.625,27.224 16.436,27.224 16.857,26.803 16.857,25.341 17.365,24.833 18.906,24.833 19.235,25.162 19.235,26.028 19.719,26.511 22.27,26.511 23.9,28.142 J2.08
GPIO15: J2.11 R13.2 U3.16 | length 39
  Top Layer w0.075: R13.2 v1(5.95,19.091) ; v1(19.355,23.241) 19.512,23.398 19.512,28.863 20.063,29.413 v1(20.701,29.413) ; U3.16 21.234,33.617 23.9,36.282 J2.11
  Bottom Layer w0.075: v1(5.95,19.091) 6.458,18.583 12.419,18.583 15.381,21.545 17.658,21.545 v1(19.355,23.241) ; v1(20.701,29.413) 20.701,35.712 22.175,37.186 J2.11
GPIO16: DS1.2 J2.01 R7.1 U3.4 | length 62.6
  Top Layer w0.075: v1(3.81,36.881) 3.915,36.986 3.915,39.239 4.293,39.617 U3.4 ; R7.1 10.262,23.75 v1(10.745,23.266) ; v1(20.549,28.265) 20.549,27.757 21.082,27.4 ; DS1.2 21.082,27.4 ; J2.01 24.689,12.575 24.689,19.888 24.384,20.193 20.828,20.193 20.447,20.574 v1(20.447,25.705) 20.447,26.765 21.082,27.4
  Bottom Layer w0.075: v1(3.81,36.881) 4.039,37.109 4.48,37.221 8.474,37.221 17.694,28.001 17.694,25.67 18.577,25.67 18.577,26.686 19.061,27.169 19.895,27.169 20.549,27.823 v1(20.549,28.265) ; v1(10.745,23.266) 18.009,23.266 18.917,24.175 19.558,24.175 19.949,24.566 19.949,25.207 v1(20.447,25.705)
NetDS1_1: DS1.1 R5.2 | length 27.3
  Top Layer w0.075: R5.2 8.509,25.39 v1(8.509,24.489) ; v1(11.913,27.356) 12.573,28.016 12.573,30.988 12.852,31.267 16.561,31.267 16.561,29.423 17.018,28.966 18.898,28.966 20.056,30.124 21.539,30.124 22.2,29.464 22.2,25.95 DS1.1
  Bottom Layer w0.075: v1(8.509,24.489) 9.782,24.489 11.913,26.619 v1(11.913,27.356)
NetQ1_2: Q1.2 R3.2 | length 4.2
  Top Layer w0.075: Q1.2 3.175,9.398 3.505,9.728 4.4,9.728 6,8.128 R3.2
NetQ2_2: Q2.2 R4.2 | length 14.9
  Top Layer w0.075: R4.2 19.318,7.25 19.71,6.858 19.71,6.325 20.625,5.41 20.625,4.521 21.336,3.81 23.978,3.81 24.232,4.064 24.232,9.677 23.029,9.677 22.75,9.398 Q2.2
NetR0_2: R0.2
NetR7_2: R7.2 R8.2 RST.1 | length 42.2
  Top Layer w0.075: v1(3.213,18.682) 2.613,19.282 ; R8.2 5.182,25.39 5.182,25.019 4.826,24.663 3.048,24.663 2.303,23.918 2.303,21.446 2.613,21.136 2.613,19.282 ; RST.1 4.288,1.3 1.524,4.064 1.524,9.449 2.303,10.228 2.303,13.213 2.613,13.523 2.613,19.282 ; v1(9.217,25.895) 9.217,25.25 R7.2
  Bottom Layer w0.075: v1(3.213,18.682) 3.213,19.93 9.178,25.895 v1(9.217,25.895)
NetR9_2: FLASH.1 R9.2 | length 72.6
  Top Layer w0.075: v1(1.854,13.437) 2.284,13.866 2.284,20.627 1.778,21.133 1.016,21.133 0.711,21.438 0.711,25.085 1.016,25.39 R9.2 ; FLASH.1 v1(20.955,1.3)
  Bottom Layer w0.075: v1(1.854,13.437) 3.886,13.437 14.574,2.749 15.417,2.749 15.717,3.048 15.717,14.853 15.977,15.113 24.384,15.113 24.689,14.808 24.689,5.034 v1(20.955,1.3)
nRST: C8.1 J1.13 Q1.3 R8.1 R12.2 U3.1 | length 91.8
  Top Layer w0.075: Q1.3 2.675,12.884 4.146,14.354 6.861,14.354 7.239,14.732 v1(7.239,14.85) ; U3.1 4.064,45.617 1.5,43.053 J1.13 0.711,41.477 0.711,29.972 ; R8.1 6.48,23.6 6.756,23.876 6.756,25.908 6.502,26.162 0.965,26.162 0.711,26.416 0.711,29.972 ; R12.2 v1(7.95,19.126) ; v1(9.119,31.471) 8.89,31.471 8.548,31.129 8.548,28.975 6.865,28.975 5.444,30.396 1.135,30.396 0.711,29.972 ; C8.1 13.425,23.749 v1(16.84,23.749)
  Bottom Layer w0.075: v1(7.239,14.85) 5.508,16.58 5.508,19.304 9.953,23.749 10.111,23.749 ; v1(7.95,19.126) 7.95,21.588 9.448,21.588 9.448,23.085 10.111,23.749 ; v1(9.119,31.471) v1(16.84,23.749) 10.111,23.749
OTG_ID: J0.4
RESV: J1.03
RI: 
RTS: Q1.1 R4.1 | length 18.9
  Top Layer w0.075: Q1.1 4.263,9.275 4.801,8.738 4.801,6.096 5.486,5.41 17.015,5.41 17.955,6.35 R4.1
RXD0: J2.12 R0.1 U3.21 | length 28
  Top Layer w0.075: R0.1 12.497,25.4 15.17,28.073 v1(18.741,28.073) ; U3.21 21.514,43.617 21.514,42.112 J2.12
  Bottom Layer w0.075: v1(18.741,28.073) 18.741,34.567 J2.12
"SPI CLK": J1.09 U3.14 | length 21.4
  Top Layer w0.075: v1(10.084,28.829) 10.465,28.829 10.846,29.21 10.846,31.496 11.176,31.826 16.868,31.826 17.706,30.988 U3.14
  Bottom Layer w0.075: J1.09 6.807,32.106 v1(10.084,28.829)
"SPI INT": J1.06 U3.9 | length 11.3
  Top Layer w0.075: v1(6.629,30.048) 7.137,30.556 7.137,30.734 7.706,30.734 U3.9
  Bottom Layer w0.075: J1.06 2.464,25.45 2.464,28.448 4.064,30.048 v1(6.629,30.048)
"SPI MISO": J1.08 U3.10 | length 9.7
  Top Layer w0.075: J1.08 2.42,28.646 9.143,28.646 9.706,29.21 U3.10
"SPI MOSI": J1.07 U3.13 | length 16.7
  Top Layer w0.075: J1.07 9.311,27.026 10.099,26.238 12.7,26.238 15.706,29.245 U3.13
TXD0: J2.13 U3.22 | length 5.6
  Top Layer w0.075: U3.22 21.515,45.617 23.9,43.232 J2.13
VCC3V3: C3.1 C5.1 C6.1 C7.1 J1.11 J2.06 J2.15 R5.1 R6.1 R10.1 R11.1 R12.1 U2.2 U3.8 | length 146.3
  Top Layer w0.075: J1.11 3.586,35.1 3.586,32.004 3.973,31.617 U3.8 ; C7.1 7.637,11.45 7.681,11.494 7.681,15.275 ; C3.1 C3.1@7.6,19.974 ; R5.1 8.661,23.6 8.661,23.368 10.398,21.631 10.398,20.818 10.667,20.55 C5.1 ; R11.1 10.95,18.011 10.732,17.793 9.995,17.793 ; v1(12.624,20.65) v1@12.724,20.55 ; R10.1 13.233,18.65 14.133,17.75 R6.1 14.4,17.323 14.907,16.816 17.426,16.816 18.333,17.724 18.333,18.824 18.796,19.287 20.185,19.287 21.107,18.364 21.107,16.256 20.574,15.723 8.128,15.723 7.681,15.275 ; C6.1 12.799,20.475 v1@12.724,20.55 ; v1(14.681,37.567) 17.628,40.513 21.666,40.513 23.241,38.938 24.384,38.938 24.689,39.243 24.689,46.557 J2.15 ; U2.2 v1(17.439,22.6) 17.876,22.6 18.136,22.86 v1(18.136,26.111) ; v1(22.784,30.353) 22.784,25.602 J2.06 ; C3.1@7.6,19.974 7.6,19.837 8.458,19.837 8.788,19.507 11.095,19.507 11.4,19.812 C5.1 ; C3.1@7.6,19.974 7.407,19.974 7.407,19.153 7.05,18.796 R12.1 7.05,18.034 7.291,17.793 9.995,17.793 ; 7.681,15.275 7.681,15.478 9.995,17.793 ; C5.1 12.624,20.55 v1@12.724,20.55
  Bottom Layer w0.075: J1.11 1.864,37.55 ; v1(12.624,20.65) 14.249,22.276 17.115,22.276 v1(17.439,22.6) ; v1(14.681,37.567) 8.637,37.559 ; v1(18.136,26.111) 18.136,26.924 ; v1(22.784,30.353) 22.057,29.626 22.057,28.337 21.174,28.337 20.783,28.727 20.295,28.727 19.075,27.508 18.72,27.508 18.136,26.924 ; 1.864,37.55 8.629,37.567 8.637,37.559 ; 1.864,37.55 8.637,37.559 ; 8.637,37.559 18.136,28.043 18.136,26.924
VCC5V: C4.1 D1.2 J1.15 U2.3 | length 65.1
  Top Layer w0.075: C4.1 10.135,18.5 10.135,18.796 10.414,19.075 12.192,19.075 ; U2.3 15.189,20.3 15.189,19.634 12.751,19.634 12.192,19.075 ; v1(18.288,28.524) 19.183,28.524 19.183,27.362 18.906,27.085 18.906,20.718 v1(19.558,20.066) ; D1.2 20.323,17.297 20.498,17.297 20.777,17.018 20.777,16.51 20.425,16.158 13.662,16.158 12.395,17.424 12.395,19.075 12.192,19.075
  Bottom Layer w0.075: J1.15 0.711,46.557 0.711,44.323 6.42,38.614 17.272,38.614 18.288,37.598 v1(18.288,28.524) ; D1.2 19.4,19.908 v1(19.558,20.066)
VCCUSB: C1.2 C2.2 D1.1 J0.1 | length 57.9
  Top Layer w0.075: v1(1.067,4.115) 1.067,10.693 0.711,11.049 0.711,19.863 1.189,20.341 v1(1.524,20.396) ; v1(3.073,22.809) 4,22.809 C1.2 4.826,22.25 4.951,22.125 C2.2 ; J0.1 11.1,4.471 11.684,5.055 v1(17.551,5.055)
  Bottom Layer w0.075: v1(1.067,4.115) 3.124,2.057 16.995,2.057 19.4,4.462 19.4,6.903 ; v1(1.524,20.396) 3.073,21.946 v1(3.073,22.809) ; v1(17.551,5.055) 19.4,6.903 ; D1.1 19.4,6.903
pads on no net: FLASH.H1 J0.10 J0.11 Q1.4 Q1.5 Q1.6 Q1.7 Q1.8 Q1.9 Q1.10 Q1.11 Q1.12 Q1.13 Q1.14 Q1.15 Q2.4 Q2.5 Q2.6 Q2.7 Q2.8 Q2.9 Q2.10 Q2.11 Q2.12 Q2.13 Q2.14 Q2.15 RST.H1 U0.A1 U0.A2 U0.A3 U0.A4 U0.A5 U0.A6 U0.A7 U0.A8 U0.A9 U0.B1 U0.B2 U0.B3 U0.B4 U0.B5 U0.B6 U0.B7 U0.B8 U0.B9 U0.C1 U0.C2 U0.C3 U0.C4 U0.C5 U0.C6 U0.C7 U0.C8 U0.C9 U0.D1 U0.D2 U0.D3 U0.D4 U0.D5 U0.D6 U0.D7 U0.D8 U0.D9 U0.E1 U0.E2 U0.E3 U0.E4 U0.E5 U0.E6 U0.E7 U0.E8 U0.E9 U0.F1 U0.F2 U0.F3 U0.F4 U0.F5 U0.F6 U0.F7 U0.F8 U0.F9 U0.G1 U0.G2 U0.G3 U0.G4 U0.G5 U0.G6 U0.G7 U0.G8 U0.G9 U0.H1 U0.H2 U0.H3 U0.H4 U0.H5 U0.H6 U0.H7 U0.H8 U0.H9 U0.J1 U0.J2 U0.J3 U0.J4 U0.J5 U0.J6 U0.J7 U0.J8 U0.J9 U2.4
copper on no net:
  other v2: 2.375,5.35 3.475,5.35 21.95,5.35 23.05,5.35 2.375,6.45 3.475,6.45 21.95,6.45 23.05,6.45 2.375,7.55 3.475,7.55 21.95,7.55 23.05,7.55 2.375,8.65 3.475,8.65 21.95,8.65 23.05,8.65

## Silkscreen, mask and mechanical layers (free items; w line width, h text height)
Top Overlay:
  text "VASAVI MCU" at 0.5,48.052 h0.74
Bottom Overlay:
  circle w0.262: c1.5,1.5 r1
  circle w0.262: c24,1.5 r1
  circle w0.262: c1.5,50.3 r1
  circle w0.262: c24,50.3 r1
Mechanical 1:
  the board outline again, w0.254